# Altium PCB 10515.0502_CVSP1_2020 1P.PcbDoc (part 2 of 2)
Units mm, origin at the board's own origin, x right, y up, seen from the top; angles counter-clockwise.
Board outline 150.42 x 82.13 mm, 2 copper layers (Top Layer, Bottom Layer); 61 components, 37 nets, 190 pads, 35 vias.
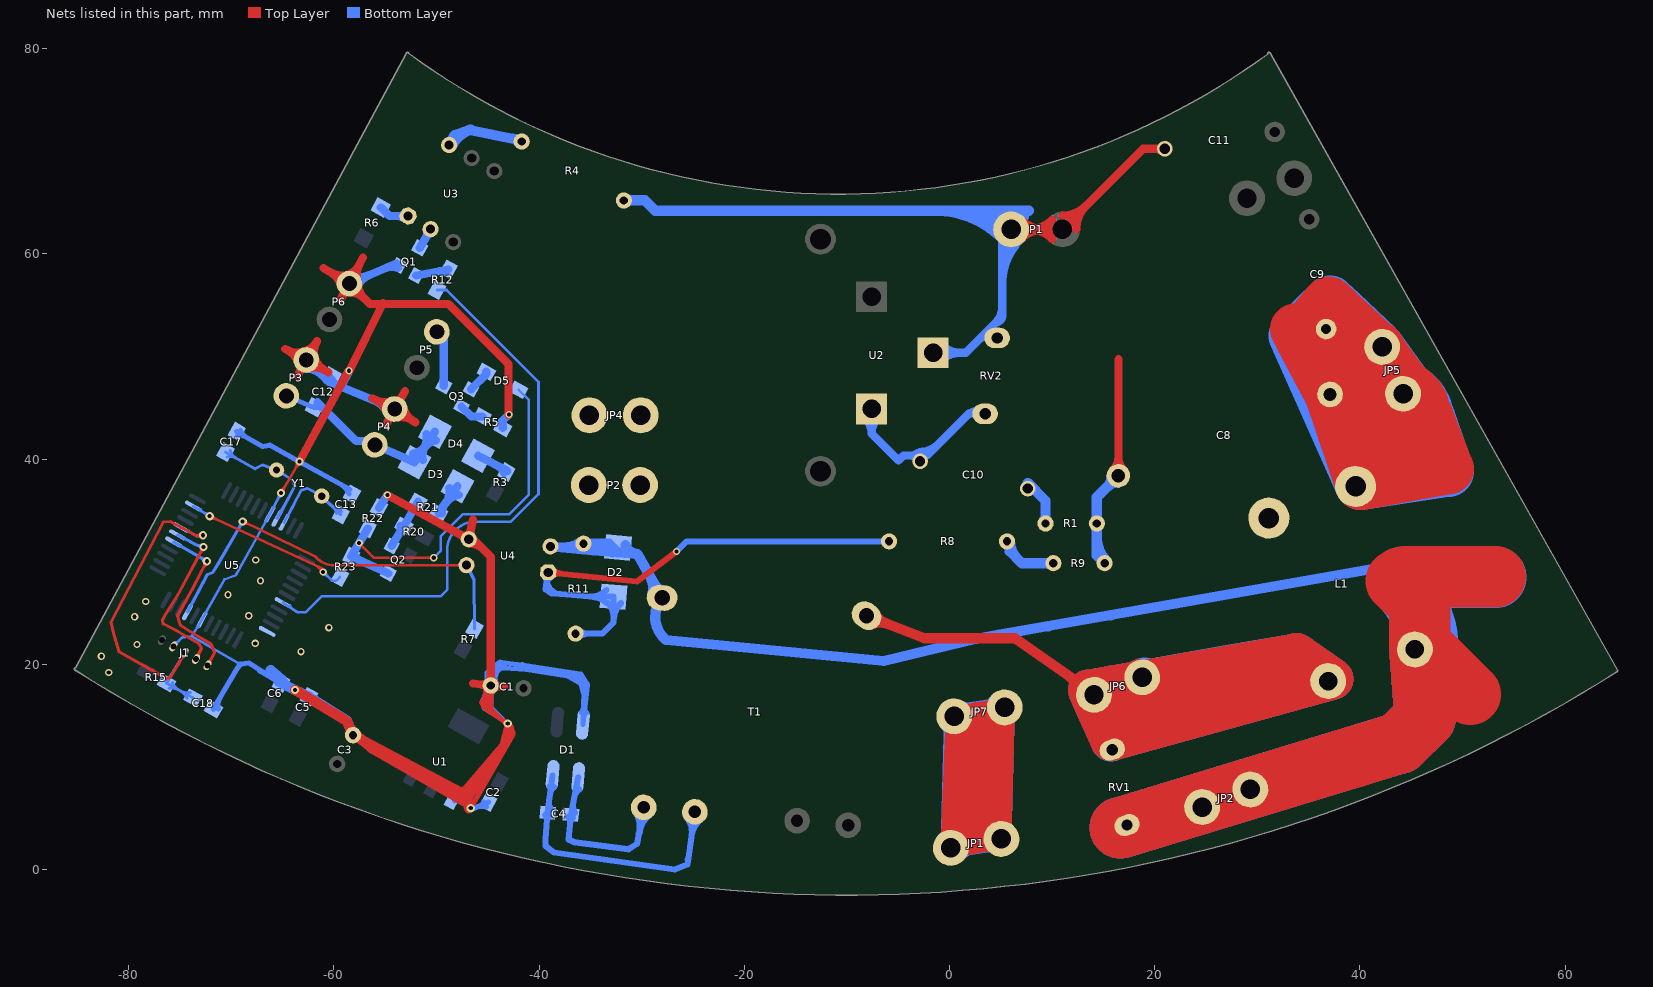
[diagram p2: the nets of this part, all layers, seen from the top]

## Via types
v1: diameter 0.7, hole 0.4, Top Layer to Bottom Layer, tented both sides, 23 vias
v2: diameter 0.8, hole 0.4, Top Layer to Bottom Layer, tented both sides, 12 vias

## Nets (pads, with @x,y where several pads share a name; then routed paths per layer and width w, separated by ;. In a path a pad name is that pad's centre, name@x,y a point inside that pad or via, vN(x,y) a via of type N, cw(c..) or ccw(c..) an arc to the next point about the centre after c; other vN are vias at no path point) (continued)
GND: C1.2 C2.1 C3.2 C5.1 C6.1 C12.1 C13.1 C17.1 C18.1 D1.4 J1.2 P3.1 P4.1 P6.1 Q1.2 R5.1 R22.1 U1.1 U4.3 U5.6 U5.29 | length 453.6
  Top Layer w0.254: v2@-65.22,36.967 ccw(c-65.386,37.605) -64.818,37.272 ccw(c-64.249,36.938) v2@-64.887,36.772 ; v2(-65.151,36.703) v2(-63.364,39.751) -61.785,42.545 -61.658,42.799 v1@-58.547,48.641 ; v2@-63.628,39.682 cw(c-64.266,39.516) -63.697,39.183 cw(c-63.129,38.849) v2@-63.295,39.487 ; v2@-63.437,40.014 ccw(c-63.614,40.649) -63.04,40.325 ccw(c-62.466,40.001) v2@-63.101,39.824 ; P3.1@-62.704,49.657 -62.094,49.274 P3.1@-62.648,49.617 ; -58.856,48.061 cw(c-58.264,47.745) v1@-58.46,48.387 ; -58.768,48.225 ccw(c-59.127,48.416) v1@-58.738,48.535 ; C3.2@-57.45,13.265 -57.375,12.978 -57.284,12.631 -57.272,12.582 -57.186,12.254
  Top Layer w0.508: C3.2@-57.999,12.558 cw(c-57.661,11.284) -56.999,12.424 cw(c-56.337,13.563) C3.2@-57.611,13.226 ; -57.225,12.957 -57.375,12.978 C3.2@-58.139,13.086 ; -47.635,7.49 -43.642,12.126 ; -47.354,6.71 cw(c-48.017,5.673) v2@-46.815,5.938 ; -47.329,6.694 cw(c-47.953,5.716) v2@-46.816,5.941 ; -47.017,6.434 ccw(c-46.525,6.128) v2@-46.919,5.704 ; -46.691,6.957 ccw(c-46.098,6.588) v2@-46.573,6.076 ; C1.2@-45.238,17.769 cw(c-46.496,17.374) -45.328,16.764 cw(c-44.159,16.153) C1.2@-44.554,17.411 ; C1.2@-45.052,17.501 cw(c-45.587,16.815) -44.717,16.815 ; -44.701,15.312 -44.717,15.328 -44.717,15.634 ; C1.2@-44.381,17.501 ccw(c-43.847,16.815) -44.717,16.815 ; -44.098,10.485 -43.707,11.89 ; -43.42,14.437 ccw(c-43.168,14.806) v2@-43.086,14.367 ; -43.157,12.134 -43.053,13.462 v2@-43.059,14.191 ; v2@-43.134,14.099 cw(c-43.758,13.059) -42.581,13.353 ; C3.2@-58.139,13.086 -57.186,12.254 -56.388,11.557 v2(-46.672,5.969) ; C3.2@-58.139,13.086 -57.272,12.582 -49.276,7.938 -47.471,6.784 -46.99,6.477 ; -46.99,6.477 v2(-46.672,5.969) ; -46.99,6.477 -46.551,7.182 -46.239,7.684 -46.001,8.066 -45.212,9.335 -43.707,11.89 ; v2(-46.672,5.969) -42.545,13.208 -42.735,13.97 v2@-43.059,14.191 ; -44.717,15.634 -45.212,16.129 -45.212,16.319 -44.717,16.815 ; -44.717,15.634 -43.813,14.73 -43.813,14.706 ; -44.717,15.634 -44.717,16.815 ; -44.717,16.815 C1.2@-44.717,17.932 -45.593,16.256 -45.339,15.748 -45.074,15.567 -43.813,14.706 ; -43.813,14.706 -43.074,14.201 v2@-43.067,14.196 ; -43.707,11.89 -43.642,12.126 ; -43.642,12.126 v2@-43.067,14.196 ; v2@-43.067,14.196 v2(-43.059,14.224) v2@-43.059,14.191 ; v2@-43.067,14.196 v2@-43.059,14.191
  Top Layer w0.8: -64.75,50.725 P3.1@-62.704,49.657 ; -63.552,48.126 P3.1@-62.704,49.657 ; P3.1@-63.515,49.402 ccw(c-65.473,48.787) -64.523,50.606 ccw(c-63.574,52.426) P3.1@-62.959,50.468 ; v2(-63.364,39.751) v1@-58.547,48.641 ; P3.1@-62.928,50.477 ccw(c-63.468,52.457) -61.686,51.439 ccw(c-59.904,50.42) P3.1@-61.884,49.881 ; P3.1@-62.468,48.84 cw(c-61.9,46.868) -60.908,48.665 cw(c-59.916,50.461) P3.1@-61.887,49.892 ; -61.65,51.501 P3.1@-62.704,49.657 ; -61.025,58.613 P6.1@-58.5,57.1 ; -60.525,48.453 P3.1@-62.704,49.657 ; -59.348,55.569 P6.1@-58.5,57.1 ; P6.1@-59.325,56.893 ccw(c-61.315,56.395) -60.26,58.155 ccw(c-59.205,59.915) P6.1@-58.707,57.925 ; P6.1@-58.754,57.911 ccw(c-59.366,59.87) -57.548,58.918 ccw(c-55.73,57.966) P6.1@-57.689,57.354 ; v1(-58.525,48.6) -55.221,55.208 ; P6.1@-58.5,56.25 cw(c-58.5,54.198) -57.049,55.649 cw(c-55.598,57.1) P6.1@-57.65,57.1 ; -57.175,59.629 P6.1@-58.5,57.1 ; -56.275,45.913 P4.1@-54.075,44.875 ; -54.923,43.344 P4.1@-54.075,44.875 ; P4.1@-54.875,44.588 ccw(c-56.807,43.895) -55.931,45.751 ccw(c-55.055,47.607) P4.1@-54.362,45.675 ; v1(-54.8,36.5) -47.838,32.713 U4.3@-46.864,32.184 ; P4.1@-53.894,44.045 cw(c-53.457,42.039) -52.348,43.766 cw(c-51.239,45.493) P4.1@-53.245,45.056 ; -53.066,46.607 P4.1@-54.075,44.875 ; -52.05,43.575 P4.1@-54.075,44.875 ; U4.3@-47.076,32.508 ccw(c-47.588,33.291) -46.672,33.099 ccw(c-45.757,32.907) U4.3@-46.54,32.395 ; U4.3@-46.864,31.796 cw(c-46.864,29.831) -45.475,31.221 ; -46.462,18.125 C1.2@-44.717,17.932 ; -46.462,34.1 U4.3@-46.864,32.184 ; C1.2@-45.029,17.682 ccw(c-45.783,17.078) -45.677,18.038 ccw(c-45.57,18.998) C1.2@-44.967,18.244 ; C1.2@-45,18.215 ccw(c-45.683,18.898) -44.717,18.898 ccw(c-43.751,18.898) C1.2@-44.434,18.215 ; C1.2@-44.46,17.625 cw(c-43.839,16.886) -43.755,17.848 cw(c-43.671,18.81) C1.2@-44.41,18.189 ; -43.422,17.819 C1.2@-44.717,17.932 ; v1@-43,44.3 -43,49.258 -48.852,55.11 -56.51,55.11 P6.1@-58.5,57.1 ; -47.686,32.63 cw(c-48.133,31.809) U4.3@-47.236,32.074 ; -47.686,32.63 ccw(c-47.239,33.452) U4.3@-46.974,32.555 ; -47.686,32.63 cw(c-48.133,31.809) U4.3@-47.236,32.074 ; -47.686,32.63 ccw(c-47.239,33.452) U4.3@-46.974,32.555 ; -47.686,32.63 cw(c-48.133,31.809) U4.3@-47.236,32.074 ; -47.686,32.63 ccw(c-47.239,33.452) U4.3@-46.974,32.555 ; U4.3@-46.864,32.184 -46.438,32.184 -44.717,30.463 C1.2@-44.717,17.932
  Top Layer w1: v2(-63.786,17.494) -58.737,14.478 C3.2@-58.139,13.086 -57.284,12.631 -47.635,7.49 ; -57.272,12.582 -55.568,11.593 ; -46.926,7.112 -47.635,7.49 ; -46.253,7.977 -44.841,9.964 ; -46.001,8.066 -47.635,7.49
  Bottom Layer w0.254: J1.2@-75.661,21.736 -74.803,22.606 -73.85,22.733 ; J1.2@-75.565,22.084 ccw(c-75.569,22.686) -75.141,22.263 ; -73.373,23.507 cw(c-73.127,23.355) U5.6@-73.193,23.636 ; -69.151,20.002 -73.85,22.733 ; U5.29@-65.847,35.236 cw(c-65.629,35.303) -65.831,35.41 ; v2@-65.412,36.622 cw(c-66.041,36.427) -65.458,36.12 cw(c-64.875,35.813) v2@-65.07,36.442 ; v2(-65.151,36.703) U5.29@-66.256,34.602 -67.501,32.371 -69.57,28.659 -70.675,28.258 U5.6@-72.871,24.319 -73.85,22.733
  Bottom Layer w0.5: P3.1@-62.315,49.432 P3.1@-61.966,49.239
  Bottom Layer w0.508: C18.1@-71.755,15.621 -69.532,19.431 -69.151,20.002 -68.326,20.13 C6.1@-65.151,18.161 -67.246,19.367 ; C18.1@-71.275,15.656 cw(c-69.967,16.001) -71.136,16.683 ; C17.1@-69.469,42.672 -66.929,41.212 -66.23,41.338 v2(-63.364,39.751) C13.1@-58.472,37.041 ; C17.1@-69.37,42.304 cw(c-69.13,41.416) -68.672,42.214 cw(c-68.213,43.011) C17.1@-69.101,42.771 ; -66.198,18.81 ccw(c-65.485,19.96) C6.1@-65.176,18.643 ; C6.1@-65.519,18.062 ccw(c-66.407,17.823) -65.948,18.62 ccw(c-65.489,19.417) C6.1@-65.25,18.529 ; P3.1@-62.704,49.657 C12.1@-60.262,48.006 ; P3.1@-62.515,48.679 cw(c-62.059,46.318) -60.712,48.31 cw(c-59.365,50.302) P3.1@-61.726,49.846 ; C5.1@-62.42,16.828 -58.756,14.523 -58.483,14.351 -58.143,13.085 C3.2@-58.075,12.832 ; C5.1@-62.397,16.345 cw(c-62.097,15.026) -61.377,16.171 ; P3.1@-61.784,49.035 cw(c-63.074,47.127) C12.1@-60.813,47.564 ; C12.1@-60.768,48.348 cw(c-61.371,47.456) C12.1@-60.314,47.66 ; -59.237,37.465 cw(c-59.952,36.175) C13.1@-58.534,36.582 ; C3.2@-58.612,13.358 ccw(c-59.74,14.009) -58.482,14.347 ; -58.483,14.35 ccw(c-57.24,14.684) C3.2@-57.871,13.562 ; U1.1@-48.323,6.985 -46.651,6.005 -46.482,5.905 C2.1@-44.958,6.54 ; U1.1@-48.249,6.699 cw(c-48.068,6.007) -47.707,6.624 cw(c-47.346,7.24) U1.1@-48.037,7.06 ; -47.042,6.234 cw(c-47.292,5.807) v2@-46.814,5.932 ; v2@-46.617,6.104 ccw(c-46.311,6.846) -46.003,6.105 ; -46.075,6.075 cw(c-45.617,4.978) C2.1@-45.165,6.077 ; C2.1@-45.723,6.222 ccw(c-45.973,6.822) C2.1@-45.372,6.574 ; C1.2@-45.238,17.769 cw(c-46.497,17.377) -45.329,16.765 cw(c-44.162,16.152) C1.2@-44.554,17.411 ; C1.2@-45.103,18.318 ccw(c-46.035,19.25) -44.717,19.25 ccw(c-43.399,19.25) C1.2@-44.331,18.318 ; C1.2@-45.07,17.516 cw(c-45.72,16.751) -44.717,16.751 ; C1.2@-45.058,18.359 ccw(c-45.88,19.389) -44.57,19.242 ccw(c-43.26,19.095) C1.2@-44.29,18.273 ; C1.2@-44.912,18.442 ccw(c-45.383,19.673) -44.179,19.136 ccw(c-42.976,18.598) C1.2@-44.207,18.127 ; C1.2@-44.553,18.453 cw(c-44.326,19.177) -45.085,19.177 ; C1.2@-44.363,17.516 ccw(c-43.713,16.751) -44.717,16.751 ; -44.005,19.748 -44.133,19.621 -44.133,19.241 ; -43.611,14.68 -44.717,15.786 ; v2(-43.059,14.224) -45.339,15.684 -45.529,16.383 -45.159,17.09 ; -37.255,18.857 -35.922,18.086 ; D1.4@-35.9,15.283 ccw(c-36.356,15.769) -35.69,15.748 ; D1.4@-35.892,15.29 ccw(c-36.398,15.867) -35.632,15.817 ; D1.4@-35.878,15.302 ccw(c-36.452,16.029) -35.532,15.921 ; -35.682,15.986 ccw(c-34.678,15.953) D1.4@-35.411,15.267 ; -35.626,15.913 ccw(c-34.724,15.855) D1.4@-35.403,15.259 ; -35.547,15.793 ccw(c-34.808,15.706) D1.4@-35.392,15.245 ; -45.159,17.09 -45.056,17.09 -44.717,16.751 ; -45.159,17.09 C1.2@-44.717,17.932 ; -45.085,19.177 -45.085,18.3 C1.2@-44.717,17.932 ; -45.085,19.177 -44.717,19.545 ; -44.717,15.786 -44.717,16.751 ; -44.717,15.786 -45.085,16.154 -45.085,16.383 -44.717,16.751 ; -44.717,16.751 C1.2@-44.717,17.932 ; C1.2@-44.717,17.932 -44.514,19.748 ; C1.2@-44.717,17.932 -44.133,19.241 ; C1.2@-44.717,17.932 -44.717,19.545 ; -44.717,19.545 -44.514,19.748 ; -44.514,19.748 -43.815,20.193 -43.289,20.131 ; -44.133,19.241 -43.289,20.131 ; -43.289,20.131 -41.656,19.939 -35.944,19.028 -35.472,18.28 ; -43.289,20.131 -43.497,19.621 -41.275,19.494 -36.068,18.669 -35.922,18.086 ; -35.922,18.086 -35.687,17.145 -35.636,17.417 ; D1.4@-35.742,14.134 -35.288,17.99 -35.472,18.28 ; D1.4@-35.742,14.134 -35.472,18.28 ; D1.4@-35.742,14.134 -35.636,17.417 ; -35.636,17.417 -35.472,18.28
  Bottom Layer w0.6: P3.1@-61.975,49.236 P3.1@-61.966,49.239
  Bottom Layer w0.8: P3.1@-62.704,49.657 -60.5,47.525 P4.1@-54.075,44.875 ; P3.1@-62.69,48.807 cw(c-62.656,46.755) -61.229,48.23 cw(c-59.802,49.705) P3.1@-61.854,49.671 ; -61.144,48.148 ccw(c-60.459,48.857) C12.1@-60.442,47.871 ; C12.1@-60.221,47.726 ccw(c-59.3,48.11) -59.68,47.187 ; -59.316,47.037 v1(-58.525,48.6) ; P6.1@-58.5,57.1 Q1.2@-53.9,59.065 ; P6.1@-58.183,57.889 ccw(c-57.419,59.793) -56.613,57.906 ccw(c-55.807,56.019) P6.1@-57.711,56.783 ; R22.1@-55.6,35.225 v1(-54.8,36.5) ; -54.945,58.618 cw(c-54.345,57.212) Q1.2@-53.775,58.631 ; P4.1@-54.86,44.549 ccw(c-56.755,43.76) -55.972,45.657 ccw(c-55.19,47.555) P4.1@-54.401,45.66 ; R5.1@-43.55,43.025 -43.55,43.75 v1(-42.95,44.35)
  Bottom Layer w1: -66.173,19.421 C6.1@-65.143,18.535 ; -65.53,18.868 cw(c-66.108,18.196) C6.1@-65.224,18.262 ; C6.1@-65.151,18.161 v2(-63.786,17.494) C5.1@-62.42,16.828 -58.756,14.523 C3.2@-58.143,13.085 ; C6.1@-64.962,18.316 ccw(c-64.244,18.563) -64.577,17.881 ; -62.994,17.108 cw(c-63.327,16.426) C5.1@-62.61,16.673 ; C5.1@-62.452,16.585 cw(c-62.284,15.845) -61.88,16.487
  other v1: -81.95,19.2 -82.675,20.775 -63.226,21.225 -79.2,21.925 -67.675,22.037 -60.5,23.561 -79.425,24.625 -68.306,24.725 -78.35,26.125 -70.338,26.775 -67.15,28.133 -67.625,30.165
ICDCLK: J1.5 U5.16 | length 19.5
  Top Layer w0.3: -74.93,25.273 -75.248,24.701 ; v2@-72.629,29.961 cw(c-73.204,29.78) -72.67,29.501 cw(c-72.135,29.221) v2@-72.315,29.797 ; v2(-72.39,30.035) -73.85,27.241 -75.248,24.701 ; J1.5@-72.328,19.889 -71.628,21.145 -71.992,21.971 -73.914,23.13 -74.956,23.786 -75.093,24.217 ; J1.5@-72.272,20.208 ccw(c-72.372,20.558) -72.054,20.381 ; J1.5@-72.087,20.105 cw(c-71.74,20.204) -72.055,20.379 ; -75.248,24.701 -75.095,24.223 ; -75.095,24.223 -75.093,24.217 ; -75.095,24.223 -75.096,24.218 -75.093,24.217
  Bottom Layer w0.3: U5.16@-75.637,31.912 v2@-72.581,30.162 ; -72.939,30.368 cw(c-73.265,29.798) v2@-72.631,29.97 ; -72.873,30.33 ccw(c-72.6,30.808) v2@-72.456,30.277
ICDDAT: J1.4 U5.17 | length 19.5
  Top Layer w0.3: J1.4@-73.439,20.505 -72.898,21.526 -73.172,22.014 -75.184,23.177 -76.644,23.939 -76.708,24.32 -76.391,24.892 -75.12,26.924 v2(-72.707,31.432) ; J1.4@-73.386,20.823 ccw(c-73.489,21.157) -73.18,20.993 ; J1.4@-73.199,20.724 cw(c-72.84,20.834) -73.172,21.01 ; v2@-72.947,31.36 cw(c-73.524,31.185) -72.992,30.9 cw(c-72.46,30.616) v2@-72.635,31.193
  Bottom Layer w0.3: U5.17@-75.249,32.612 -73.406,31.623 v2(-72.707,31.432) ; v2@-72.925,31.308 ccw(c-73.449,31.009) -73.29,31.591 ccw(c-73.131,32.174) v2@-72.832,31.65
IO_CONTROL_TRIAC: R12.1 U5.40 | length 57.4
  Bottom Layer w0.254: -63.563,25.082 -62.743,25.082 -61.2,26.625 -49.6,26.625 -48.975,27.25 -48.975,31.173 cw(c-46.435,31.173) -48.231,32.969 -48.025,33.175 cw(c-46.305,31.455) -46.305,33.887 -42.763,33.887 -40.068,36.582 -40.068,47.518 -49.025,56.475 R12.1@-49.95,56.475
  Bottom Layer w0.3: U5.40@-64.966,25.997 -63.563,25.082 ; U5.40@-64.305,25.668 ccw(c-64.019,25.729) -64.179,25.484
IO_START_SWITCH: R23.1 U5.21 | length 21.2
  Top Layer w0.254: v2(-72.113,34.43) -61.185,29.345 ; v2@-72.019,34.173 cw(c-71.793,33.554) -71.515,34.152 cw(c-71.237,34.749) v2@-71.856,34.523 ; -61.728,29.598 cw(c-62.064,28.876) v1@-61.272,28.953 ; -61.326,29.411 cw(c-61.551,28.926) v1@-61.019,28.978 ; v1@-61.223,29.115 ccw(c-61.408,29.264) -61.185,29.345 ; v1(-61.05,28.975) -61.185,29.345 ; v1@-61.008,29.194 cw(c-60.962,29.427) -61.185,29.345
  Bottom Layer w0.254: U5.21@-73.697,35.411 v2(-72.113,34.43) ; U5.21@-73.014,35.088 ccw(c-72.731,35.155) -72.884,34.907 ; v2@-72.378,34.367 ccw(c-73.02,34.216) -72.673,34.777 ccw(c-72.326,35.337) v2@-72.175,34.696 ; v1@-61.05,28.752 cw(c-61.05,28.166) -60.635,28.58 ; v1@-60.904,28.849 -60.205,28.15 -59.775,28.15 R23.1@-59.425,28.5 ; v1@-60.827,28.975 ccw(c-60.337,28.975) -60.683,28.628
IO_WORK_INDICATE_LED: U5.44
IO_ZERO_DETECT: R7.1 U4.4 U5.8 | length 41.7
  Top Layer w0.254: v2(-68.9,33.925) -61.872,30.526 -61.743,30.397 ccw(c-59.947,32.193) -59.947,29.653 -51.127,29.653 U4.4@-47.086,29.653 ; v2@-68.81,33.667 cw(c-68.594,33.045) -68.307,33.638 cw(c-68.02,34.231) v2@-68.642,34.015
  Bottom Layer w0.3: U5.8@-74.27,25.095 -72.326,28.765 -71.819,28.956 -71.31,29.781 v2@-68.889,33.915 ; -69.21,33.367 ccw(c-69.774,33.697) v2@-69.142,33.862 ; -69.175,33.427 cw(c-68.697,33.147) v2@-68.837,33.683 ; U4.4@-47.086,29.653 -46.355,28.258 R7.1@-46.291,23.431
L-220V: JP6.1 JP6.2 L1.1 RV1.2 T1.1 | length 285.7
  Top Layer w1: T1.1@-8.094,24.731 -2.428,22.543 6.373,22.543 12.387,18.332 ; T1.1@-7.599,23.885 cw(c-6.754,21.976) -6.002,23.923 ; T1.1@-7.217,24.874 ccw(c-5.814,25.495) -6.367,24.064 ; 11.45,18.989 cw(c9.503,16.208) JP6.2@12.846,16.798 ; 11.886,18.683 ccw(c13.401,20.847) JP6.2@13.859,18.246
  Top Layer w2: JP6.2@13.853,16.299 cw(c12.077,10.597) 17.365,13.373 ; JP6.2@14.632,18.135 cw(c12.746,14.331) 16.769,15.687 ; JP6.2@15.071,17.743 17.88,12.391 ; JP6.2@15.649,16.641 cw(c9.982,13.667) RV1.2@16.093,11.762 ; 16.02,17.911 17.88,12.391 ; 18.256,16.275 cw(c21.013,16.008) JP6.1@19.252,18.146 ; JP6.1@18.455,18.34 17.88,12.391 ; 35.078,17.824 cw(c35.661,15.979) L1.1@36.554,17.696 ; L1.1@37.383,18.552 17.88,12.391 ; RV1.2@16.093,11.762 ccw(c12.364,16.291) 18.202,15.725 cw(c12.364,16.291) RV1.2@16.093,11.762
  Top Layer w4: 16.02,17.911 18.455,18.34 23.304,19.195 ; 18.16,15.29 L1.1@37.383,18.552 ; JP6.1@18.63,18.521 ccw(c24.771,27.172) 26.546,16.713 ; 23.304,19.195 13.531,17.472 15.711,12.562 L1.1@37.383,18.552 ; 23.304,19.195 33.817,21.049 L1.1@37.383,18.552
  Bottom Layer w4: JP6.2@13.927,16.814 ccw(c17.368,21.44) 18.206,15.736 ; 15.102,15.28 L1.1@37.383,18.552 ; 15.519,15.341 ccw(c14.911,19.485) JP6.1@19.02,18.677 ; 16.02,17.911 27.193,19.881 ; JP6.1@18.626,18.524 ccw(c24.124,25.915) 25.462,16.801 ; 27.193,19.881 13.531,17.472 15.737,12.537 L1.1@37.383,18.552 ; 27.193,19.881 33.817,21.049 L1.1@37.383,18.552
L_DETECT: C8.2 C11.2 L1.4 P1.1 R1.1 R4.2 R9.1 RV2.1 U2.2 | length 155.2
  Top Layer w0.8: P1.1@5.994,62.382 10.994,62.382 18.846,70.234 C11.2@20.979,70.234 ; P1.1@6.949,61.428 cw(c9.254,59.123) 9.254,62.382 cw(c9.254,65.642) P1.1@6.949,63.337 ; 10.04,61.428 ccw(c7.735,59.123) 7.735,62.382 ccw(c7.735,65.642) 10.04,63.337 ; 10.994,63.732 ccw(c10.994,66.992) 13.299,64.687 ccw(c15.604,62.382) 12.344,62.382 ; C8.2@15.926,38.897 ccw(c14.658,40.165) 16.452,40.165 ccw(c18.246,40.165) C8.2@16.977,38.897 ; C8.2@16.452,38.372 16.452,49.723 ; C11.2@20.723,69.978 ccw(c20.105,69.36) 20.105,70.234 ccw(c20.105,71.108) C11.2@20.723,70.49
  Bottom Layer w0.8: U2.2@-1.606,50.368 1.582,50.368 5.13,53.916 5.13,61.518 P1.1@5.994,62.382 ; U2.2@-0.828,49.591 cw(c1.05,47.713) 1.05,50.368 cw(c1.05,53.024) U2.2@-0.828,51.146 ; 2.729,51.515 cw(c4.384,49.861) RV2.1@4.384,52.2 ; 4.459,53.225 ccw(c2.84,54.844) 5.13,54.844 ; 4.722,53.378 ccw(c4.572,53.916) 5.13,53.916 ; 5.13,57.037 cw(c11.34,57.037) P1.1@6.949,61.428 ; 5.13,58.968 cw(c9.409,58.968) P1.1@6.383,61.993
  Bottom Layer w1: R4.2@-31.708,65.232 -29.707,65.232 -28.675,64.2 -20.135,64.2 7.736,64.2 ; -1.413,64.2 cw(c-1.413,54.975) P1.1@5.111,61.499 ; 1.002,64.2 cw(c1.002,57.39) P1.1@5.818,62.206 ; 3.416,64.2 cw(c3.416,59.804) P1.1@6.525,62.913 ; 5.83,64.2 cw(c5.83,62.218) 7.232,63.62 ; 14.351,32.378 ccw(c17.646,32.378) R9.1@15.316,30.048 ; R9.1@15.113,29.845 14.351,30.607 R1.1@14.351,33.718 14.351,36.271 C8.2@16.452,38.372 ; C8.2@15.809,38.372 cw(c14.257,38.372) 15.354,37.274 cw(c16.452,36.176) C8.2@16.452,37.729
LED_OUT: D5.2 Q2.3 R22.2 R23.2 | length 40
  Top Layer w0.254: v1(-57.544,31.809) -56.11,30.375 v1(-50.275,30.375)
  Bottom Layer w0.254: D5.2@-42.001,46.752 -41,45.752 -41,36.525 -42.9,34.625 -46.3,34.625 -47.425,34.625 -49.6,32.45 -49.6,31.05 ; -49.6,31.05 v1(-50.275,30.375) -49.6,31.05
  Bottom Layer w0.8: R23.2@-58.035,30.693 ccw(c-57.098,31.042) -57.514,30.133 ; R22.2@-56.708,33.226 R23.2@-58.317,30.499 Q2.3@-54.712,28.854
MCLR: C18.2 J1.3 R15.1 U5.18 | length 44.1
  Top Layer w0.3: -74.834,20.627 cw(c-74.511,20.441) J1.3@-74.608,20.801 ; -74.826,20.64 ccw(c-75.131,20.815) J1.3@-74.792,20.907 ; -74.826,20.628 cw(c-74.507,20.45) J1.3@-74.606,20.801 ; -74.824,20.632 ccw(c-75.137,20.808) J1.3@-74.791,20.905 ; v2@-72.964,32.734 cw(c-73.432,33.116) -73.372,32.515 cw(c-73.312,31.915) v2@-72.929,32.382 ; v2(-72.771,32.575) -73.406,32.512 -75.946,33.909 -76.644,33.846 -81.717,24.13 -81.471,23.05 -80.962,21.213 -76.327,18.605 -76.01,18.669 -75.374,19.685 -75.263,19.879 ; -75.263,19.879 -75.248,19.875 J1.3@-74.55,21.121 -75.263,19.879
  Bottom Layer w0.3: R15.1@-76.083,17.633 cw(c-75.762,16.508) -75.193,17.53 ; R15.1@-75.749,18.232 ccw(c-74.623,18.553) -75.192,17.53 ; -74.889,17.361 cw(c-75.459,16.337) C18.2@-74.332,16.658 ; -74.888,17.36 ccw(c-74.319,18.383) C18.2@-73.998,17.257 ; U5.18@-74.861,33.312 -73.406,32.512 v2(-72.771,32.575) ; -74.848,20.624 cw(c-74.517,20.426) J1.3@-74.611,20.8 ; -74.831,20.653 ccw(c-75.121,20.827) J1.3@-74.792,20.909 ; J1.3@-74.55,21.121 R15.1@-76.327,18.161 C18.2@-73.754,16.729 ; v2@-72.964,32.734 cw(c-73.432,33.116) -73.372,32.515 cw(c-73.312,31.915) v2@-72.929,32.382
MOTO_A: C10.1 JP4.1 JP4.2 P2.1 P2.2 RV2.2 U2.1 | length 25.3
  Bottom Layer w0.8: U2.1@-8.324,44.047 cw(c-9.673,42.481) -7.606,42.481 ; U2.1@-7.606,44.88 -7.606,42.481 ; U2.1@-6.888,44.047 ccw(c-5.539,42.481) -7.606,42.481 ; C10.1@-3.133,40.08 ccw(c-3.751,39.462) -3.751,40.335 ccw(c-3.751,41.209) -3.133,40.591 ; -2.877,40.697 ccw(c-2.877,43.165) -1.132,41.42 ; 1.562,44.114 cw(c3.217,42.46) RV2.2@3.217,44.799 ; RV2.2@3.5,44.775 2.842,44.775 2.492,44.425 1.873,44.425 -2.217,40.335 -4.49,40.335 -4.975,39.85 -7.606,42.481
MOTO_B: C8.1 C9.2 JP5.1 JP5.2 L1.3 | length 245
  Top Layer w5: 35.205,52.544 cw(c36.749,52.67) 35.568,53.672 ; 35.523,53.619 cw(c36.704,52.617) 36.578,54.161 ; C9.2@36.7,52.666 C9.2@36.706,52.558 ; 37.417,51.412 cw(c31.334,47.642) 38.301,46.006 ; 42.164,43.752 41.561,44.725 39.617,47.861 38.951,48.936 C9.2@36.706,52.558 ; 42.369,39.873 ccw(c35.928,46.189) JP5.2@44.948,46.375 ; C9.2@36.706,52.558 C8.1@37.084,46.292 ; C9.2@36.706,52.558 36.656,52.639 36.576,52.768 36.718,52.718 JP5.1@41.545,51.017 ; C8.1@37.084,46.292 L1.3@40.059,37.516 ; C8.1@37.084,46.292 34.368,51.434 34.099,51.943 35.545,53.646 36.957,55.308 38.138,54.204 JP5.1@41.545,51.017 ; L1.3@40.059,37.516 JP5.2@44.198,46.359 JP5.1@42.08,50.394 ; L1.3@40.059,37.516 48.595,39.052 46.605,44.192 ; L1.3@40.059,37.516 46.508,44.093 46.605,44.192 ; JP5.1@41.545,51.017 41.801,50.927 41.879,50.778 JP5.1@42.08,50.394 ; JP5.1@41.545,51.017 41.801,50.778 41.856,50.702 JP5.1@42.08,50.394 ; JP5.1@42.08,50.394 44.737,46.752 46.605,44.192 ; 33.718,52.666 ccw(c36.301,54.03) 37.121,51.226 cw(c36.301,54.03) 33.718,52.666 ; 37.37,47.508 cw(c35.734,40.541) 41.817,44.311 ccw(c35.734,40.541) 37.37,47.508 ; JP5.2@44.501,47.045 cw(c43.217,44.138) 46.181,45.286 ccw(c43.217,44.138) JP5.2@44.501,47.045
  Bottom Layer w5: C9.2@36.7,52.666 C8.1@37.084,46.292 L1.3@40.059,37.516 ; 40.957,48.768 42.42,45.551 42.545,45.276 L1.3@40.059,37.516 ; 41.325,47.96 ccw(c45.204,49.723) JP5.2@43.983,45.641 ; 42.486,39.853 ccw(c36.851,45.707) JP5.2@44.945,46.426 ; 44.198,41.501 ccw(c41.292,44.519) JP5.2@44.831,46.761 ; L1.3@40.059,37.516 48.595,38.798 46.795,44.001 ; L1.3@40.059,37.516 46.625,43.838 46.795,44.001 ; L1.3@40.059,37.516 36.299,45.941 33.862,51.399 33.591,52.006 35.532,53.877 37.084,55.372 38.231,54.291 41.801,50.927 41.925,50.755 44.788,46.785 46.795,44.001 ; JP5.2@44.525,47.034 cw(c42.805,43.493) 46.525,44.78 ccw(c42.805,43.493) JP5.2@44.525,47.034
N-220V: D2.1 JP2.1 JP2.2 L1.2 R11.1 RV1.1 T1.2 U4.2 | length 246.5
  Top Layer w1: JP2.2@24.607,6.065 JP2.2@24.617,6.084
  Top Layer w6: RV1.1@16.642,4.049 35.066,9.646 39.551,11.009 43.829,12.308 46.344,14.772 L1.2@45.841,21.63 ; 50.743,17.053 46.166,21.63 L1.2@45.841,21.63 ; 53.191,28.513 44.519,28.513 ccw(c44.519,27.142) 43.55,28.112 45.097,26.565 cw(c43.301,24.769) 45.841,24.769 L1.2@45.841,21.63
  Bottom Layer w1: U4.2@-38.895,31.486 -35.735,31.206 -34.694,31.114 D2.1@-32.363,30.907 ; -37.74,31.384 ccw(c-37.514,33.932) R11.1@-35.871,31.97 ; R11.1@-35.687,31.75 -33.206,31.75 D2.1@-32.363,30.907 ; R11.1@-35.467,31.934 ccw(c-33.505,33.577) -33.731,31.028 ; R11.1@-34.986,31.75 cw(c-34.986,28.78) D2.1@-32.886,30.88 ; D2.1@-31.595,31.606 ccw(c-30.339,32.072) -30.458,30.738 ; -29.22,28.608 cw(c-31.412,27.375) T1.2@-28.99,26.697 ; -28.731,27.74 ccw(c-27.767,28.283) T1.2@-28.065,27.218 ; T1.2@-28.517,26.472 T1.2@-28.517,26.543 ; JP2.2@24.607,6.065 JP2.2@24.617,6.084 ; L1.2@44.333,22.156 ccw(c40.436,24.885) 45.121,25.711 ; L1.2@45.152,21.583 ccw(c43.233,22.927) 45.54,23.333 ; 45.548,23.288 ccw(c46.807,23.51) L1.2@46.074,22.463 ; L1.2@45.841,21.63 44.858,27.201 43.634,28.058 42.302,28.991 41.753,29.376 15.706,24.783 9.623,23.71 4.847,22.868 2.482,22.451 -6.413,20.32 -27.622,22.352 cw(c-25.76,24.611) T1.2@-28.018,26.473 -30.416,30.734 D2.1@-32.363,30.907 ; R11.1@-35.401,31.776 ccw(c-34.678,31.841) -34.742,31.118 cw(c-34.678,31.841) R11.1@-35.401,31.776
  Bottom Layer w6: RV1.1@16.642,4.049 43.829,12.308 46.344,14.772 45.841,21.63 45.841,25.846 43.575,28.112 cw(c44.422,27.264) 44.422,28.463 53.252,28.463 ; 44.033,27.654 cw(c37.818,21.439) L1.2@46.607,21.439
NetC4_1: C4.1 D1.2 T1.4 | length 33.5
  Bottom Layer w0.6: C4.1@-39.433,5.306 cw(c-40.046,4.778) -39.24,4.718 cw(c-38.433,4.658) C4.1@-38.961,5.271 ; -39.029,6.635 ccw(c-37.798,6.469) C4.1@-38.786,5.716 ; D1.2@-39.003,8.093 cw(c-39.463,7.742) -38.89,7.665 ; -38.917,7.461 cw(c-38.055,7.344) D1.2@-38.582,8.036 ; D1.2@-38.685,9.171 C4.1@-39.179,5.524 -39.37,2.984 -39.37,2.286 -38.544,1.651 -26.797,0 -25.527,0.508 -25.445,1.107 ; T1.4@-25.581,5.042 cw(c-27.409,3.656) -25.137,3.344 cw(c-22.865,3.031) T1.4@-24.25,4.859 ; -25.527,0.953 -25.445,1.107 ; T1.4@-24.824,5.616 -25.445,1.107
NetC4_2: C4.2 D1.1 T1.3 | length 29.6
  Bottom Layer w0.6: C4.2@-37.162,5.114 cw(c-37.789,4.603) -36.984,4.521 cw(c-36.18,4.439) C4.2@-36.691,5.066 ; -36.687,6.431 ccw(c-35.47,6.194) C4.2@-36.498,5.501 ; -36.548,7.14 cw(c-35.521,6.94) D1.1@-36.106,7.808 ; D1.1@-36.195,8.953 C4.2@-36.902,5.325 -37.148,2.921 -36.707,2.72 -36.547,2.647 -31.305,1.966 -30.48,2.476 -30.288,3.492 ; T1.3@-30.59,5.516 cw(c-32.484,4.223) -30.231,3.798 cw(c-27.977,3.372) T1.3@-29.27,5.267 ; T1.3@-30.577,5.498 cw(c-32.44,4.161) -30.177,3.788 cw(c-27.914,3.416) T1.3@-29.251,5.28 ; -30.288,3.492 T1.3@-29.805,6.051 -30.226,3.492 -30.288,3.492
NetC10_2: C10.2 R1.2 | length 4.7
  Bottom Layer w1: C10.2@7.623,37.668 9.351,35.941 R1.2@9.351,33.718
NetC12_2: C12.2 D3.2 D4.2 P3.2 P4.2 | length 25.1
  Bottom Layer w0.3: P3.2@-64.656,46.206 P3.2@-63.681,46.467
  Bottom Layer w0.5: P3.2@-64.64,46.166 C12.2@-61.924,45.007
  Bottom Layer w0.8: C12.2@-61.67,45.18 cw(c-61.67,44.195) -60.974,44.891 ; C12.2@-61.608,45.526 -57.834,41.752 P4.2@-56.714,41.752 ; P4.2@-56.014,41.377 D3.2@-52.148,39.677 D4.2@-50.173,42.652 ; D3.2@-52.273,40.522 ccw(c-52.659,42.434) -51.034,41.356 ; D3.2@-51.33,39.897 cw(c-49.456,40.275) -51.049,41.333 ; -51.287,40.974 cw(c-49.662,39.895) D4.2@-50.049,41.807 ; -51.273,40.996 ccw(c-52.866,42.054) D4.2@-50.991,42.432
NetC13_2: C13.2 U5.31 Y1.2 | length 12.9
  Bottom Layer w0.3: -63.881,35.623 U5.31@-64.857,33.826 -63.182,36.957 -62.611,37.148 Y1.2@-61.196,36.386 C13.2@-59.338,34.577 ; -60.413,35.623 ccw(c-59.304,36.762) C13.2@-59.283,35.173 ; -59.989,35.21 cw(c-60.514,34.671) C13.2@-59.761,34.681 ; -59.894,35.118 ccw(c-59.29,35.738) C13.2@-59.279,34.873
NetC17_2: C17.2 U5.30 Y1.1 | length 15.4
  Bottom Layer w0.3: C17.2@-70.577,40.673 -67.691,39.052 -66.929,39.433 Y1.1@-65.596,38.925 -64.799,38.427 -64.072,37.973 -63.817,37.338 U5.30@-65.319,34.55 ; C17.2@-70.446,40.206 cw(c-70.129,39.078) -69.556,40.099 cw(c-68.983,41.121) C17.2@-70.11,40.804 ; U5.30@-65.557,34.214 -64.516,36.068 ; U5.30@-65.232,34.874 ccw(c-65.307,35.126) -65.076,35.001
NetD2_2: D2.2 R8.2 R11.2 U4.1 | length 66.5
  Top Layer w0.6: U4.1@-39.116,28.956 -30.48,28.067 v1(-26.61,30.993) ; U4.1@-38.808,28.578 cw(c-38.066,27.665) -37.945,28.836 cw(c-37.825,30.006) U4.1@-38.738,29.264
  Bottom Layer w0.5: U4.1@-39.116,28.956 ccw(c-37.634,28.363) -38.227,26.88
  Bottom Layer w0.6: U4.1@-39.509,28.668 cw(c-40.458,27.972) -39.295,27.793 cw(c-38.132,27.614) U4.1@-38.828,28.563 ; U4.1@-39.116,28.956 -39.37,27.305 -38.798,26.924 -37.973,26.86 -35.089,26.587 D2.2@-32.74,26.587 -32.74,24.093 -33.849,22.983 R11.2@-36.454,22.983 ; R11.2@-36.109,22.639 cw(c-35.277,21.807) -35.277,22.983 cw(c-35.277,24.16) R11.2@-36.109,23.328 ; -34.997,26.587 ccw(c-34.997,28.781) D2.2@-33.446,27.23 ; -34.968,26.587 cw(c-34.968,24.435) D2.2@-33.446,25.957 ; D2.2@-33.306,25.945 cw(c-34.675,24.577) -32.74,24.577 ; -32.74,24.24 cw(c-30.329,24.24) D2.2@-32.034,25.945 ; v1(-26.61,30.993) -25.653,31.95 R8.2@-5.9,31.95 ; -6.762,31.95 ccw(c-6.762,33.212) R8.2@-5.87,32.32 ; R8.2@-6.641,31.95 cw(c-6.641,30.859) R8.2@-5.87,31.63
NetD3_1: D3.1 R21.1 | length 7
  Bottom Layer w0.8: R21.1@-49.8,34.725 D3.1@-47.95,37.35 ; R21.1@-49.457,34.704 cw(c-48.474,34.874) -49.29,35.449 ; -49.113,35.7 cw(c-47.513,34.572) D3.1@-47.847,36.501 ; -49.092,35.729 ccw(c-50.65,36.827) D3.1@-48.772,37.152
NetD4_1: D4.1 R3.1 | length 4.1
  Bottom Layer w0.8: D4.1@-45.975,40.325 R3.1@-43.08,38.845 ; -43.979,39.305 cw(c-44.489,38.308) R3.1@-43.424,38.653
NetD5_1: D5.1 Q3.1 | length 2.3
  Bottom Layer w0.8: Q3.1@-46.625,46.8 -45.149,48.276 D5.1@-45.149,48.498
NetJP1_1: JP1.1 JP1.2 JP7.1 JP7.2 | length 180.5
  Top Layer w2: JP7.2@0.456,14.923 2.618,15.304 ; JP7.2@0.625,14.8 JP1.2@0.126,2.107 JP1.1@5.05,2.975 JP7.1@5.38,15.791 3.652,15.487 ; JP1.2@1.726,2.389 2.618,15.304 ; JP1.1@3.43,2.689 3.652,15.487 ; 2.618,15.304 3.652,15.487
  Bottom Layer w0.8: JP1.2@-0.829,3.061 ccw(c-3.133,5.366) 0.126,5.366 ccw(c3.385,5.366) JP1.2@1.081,3.061 ; JP7.2@-0.499,13.968 cw(c-2.008,12.46) 0.126,12.46 ; 0.126,10.868 cw(c4.511,10.868) JP7.2@1.41,13.968 ; 0.126,12.799 cw(c2.579,12.799) JP7.2@0.844,14.534 ; JP1.2@1.136,1.211 cw(c3.13,-0.559) 3.13,2.107 ; JP1.2@1.136,3.003 ccw(c3.13,4.773) 3.13,2.107 ; JP7.2@1.465,14.027 cw(c3.459,12.257) 3.459,14.923 ; JP7.2@1.465,15.819 ccw(c3.459,17.589) 3.459,14.923 ; 1.902,2.107 ccw(c1.902,5.76) JP1.1@4.638,3.339 ; 2.232,14.923 ccw(c2.232,18.576) JP7.1@4.968,16.156 ; JP1.1@4.039,3.869 cw(c0.126,7.33) JP1.2@0.126,2.107 ; JP7.1@4.368,16.686 cw(c0.456,20.147) JP7.2@0.456,14.923 ; JP1.1@5.05,2.975 4.926,2.851 cw(c3.13,4.647) 3.13,2.107 ; JP7.1@5.38,15.791 5.255,15.667 cw(c3.459,17.463) 3.459,14.923 ; JP1.2@0.126,2.107 3.13,2.107 ; JP1.2@0.126,2.107 0.126,14.127 cw(c1.251,14.127) JP7.2@0.456,14.923 ; JP7.2@0.456,14.923 2.35,14.923 3.459,14.923
  Bottom Layer w2: JP7.2@0.3,15.075 JP7.1@3.736,15.559 ; JP7.2@0.456,14.923 JP1.2@0.126,2.107 JP1.1@4.926,2.851 ; JP1.2@1.575,2.95 2.35,14.923 ; 3.275,3.45 JP7.1@3.736,15.559 ; JP1.1@5.05,2.975 JP7.1@5.38,15.791 JP7.1@3.736,15.559
NetP5_1: P5.1 Q3.3 | length 5.5
  Bottom Layer w0.8: P5.1@-49.975,52.4 -49.296,51.721 Q3.3@-49.296,47.137
NetQ1_1: Q1.1 R12.2 | length 3.9
  Bottom Layer w0.8: Q1.1@-51.975,57.9 R12.2@-48.842,58.474 ; -49.712,58.315 cw(c-49.549,57.427) R12.2@-49.037,58.17
NetQ1_3: Q1.3 U3.2 | length 3.6
  Bottom Layer w0.8: Q1.3@-51.638,60.571 U3.2@-50.575,62.405 ; U3.2@-50.95,62.305 cw(c-51.853,62.065) -51.044,61.596 cw(c-50.235,61.127) U3.2@-50.476,62.031
NetQ2_1: Q2.1 R20.1 R21.2 | length 5.8
  Bottom Layer w0.8: Q2.1@-54.375,31.525 R20.1@-53.175,33.475 R21.2@-51.799,35.833 ; -53.636,32.726 ccw(c-54.488,33.25) R20.1@-53.515,33.482
NetQ3_2: Q3.2 R5.2 | length 2.4
  Bottom Layer w0.8: Q3.2@-47.57,45.094 -46.609,44.133 R5.2@-45.549,44.133
NetR4_1: R4.1 U3.6 | length 10.6
  Bottom Layer w1: U3.6@-48.795,70.614 -48.26,71.564 -46.799,72.072 R4.1@-42.251,71.163 ; U3.6@-48.516,70.478 cw(c-45.621,69.077) -46.678,72.115 ; -42.599,71.232 cw(c-42.802,70.215) R4.1@-41.939,70.791
NetR6_2: R6.2 U3.1 | length 4.5
  Bottom Layer w0.8: R6.2@-55.437,64.524 -54.588,63.675 U3.1@-52.775,63.675 ; U3.1@-53.049,63.401 ccw(c-53.71,62.74) -53.71,63.675 ccw(c-53.71,64.61) U3.1@-53.049,63.949
NetR8_1: R8.1 R9.2 | length 8.3
  Bottom Layer w1: R8.1@5.448,31.731 cw(c5.004,31.02) 5.842,31.02 ; R8.1@5.842,31.941 5.842,31.051 7.049,29.845 R9.2@10.113,29.845 ; R8.1@5.887,31.975 ccw(c8.227,31.975) 6.573,30.321
pads on no net: P1.2 T1.5 T1.6 U2.4 U2.5 U3.3 U3.5 U5.1 U5.2 U5.3 U5.4 U5.5 U5.9 U5.10 U5.11 U5.12 U5.13 U5.14 U5.15 U5.19 U5.20 U5.22 U5.23 U5.24 U5.25 U5.26 U5.27 U5.32 U5.33 U5.34 U5.35 U5.36 U5.37 U5.38 U5.39 U5.41 U5.42 U5.43

## Polygon pours and split planes (outlines as drawn)
L_DETECT on Bottom Solder "TopLayer-No Net" (solid): 33.757,32.563 23.724,30.836 21.869,37.846 32.995,36.373 33.757,32.563
L_DETECT on Bottom Solder "TopLayer" (hatched 90Degree grid 0 track 0.025, remove dead copper): -2.222,65.278 9.525,67.373 21.526,72.644 22.733,70.612 14.478,62.547 13.018,55.499 15.303,50.419 20.383,48.514 21.717,48.514 32.194,37.91 33.147,36.258 20.574,36.893 13.906,37.084 8.954,46.038 2.857,48.069 -2.286,48.578 -2.476,65.215 -2.222,65.278
L_DETECT on Bottom Solder "TopLayer" (hatched 90Degree grid 0 track 0.025, remove dead copper): 37.02,57.531 31.305,52.324 36.068,41.275 39.306,35.496 49.911,37.02 50.863,38.798 48.514,44.895 43.307,52.387 37.02,57.531
MOTO_A on Bottom Solder "TopLayer" (hatched 90Degree grid 0 track 0.025, remove dead copper): -36.639,47.498 -30.797,50.736 -15.621,51.371 -9.525,47.307 -5.842,47.244 -4.318,45.339 5.524,44.767 5.969,41.529 4.255,39.306 -4.255,39.179 -7.683,43.243 -22.606,43.688 -25.019,37.465 -28.258,35.56 -37.02,35.369 -36.957,47.371 -36.767,47.434
GND on Top Layer "Top Layer-No Net" (hatched 90Degree grid 0.508 track 0.508, remove dead copper, pour order 1000): -61.555,64.346 -85.536,19.786 -62.866,8.07 -60.791,7.32 -58.516,6.47 -49.216,3.495 -43.469,13.757 -43.466,27.67 -42.274,48.411 -42.266,50.095 -48.14,57.145 -61.569,64.32
N-220V on Top Layer "TopLayer-No Net" (solid, pour order 20): 38.165,7.584 46.14,9.895 57.367,15.788 58.586,25.008 55.869,29.885 43.092,23.738 42.711,15.636 38.165,7.584
L_DETECT on Top Layer "TopLayer" (solid, remove dead copper, pour order 23): 21.717,73.152 -2.667,65.786 -2.476,48.45 -1.016,48.006 2.603,48.006 8.826,45.974 13.906,36.767 21.717,36.386 23.241,30.162 34.29,32.131 34.353,32.194 32.956,37.846 21.907,48.895 20.13,48.959 16.51,49.974 13.716,54.229 13.399,56.134 15.176,62.23 23.241,70.294 21.717,73.088
MOTO_A on Top Layer "TopLayer" (solid, remove dead copper, pour order 27): -37.148,46.863 -37.084,34.989 -27.94,35.115 -25.146,36.893 -22.733,42.355 -22.288,43.434 -8.001,43.053 -4.889,38.862 4.445,38.862 5.651,40.322 6.35,41.275 6.35,45.085 -4.064,45.529 -5.524,47.434 -37.148,48.006 -37.148,46.482
MOTO_A on Top Layer "TopLayer" (solid, remove dead copper, pour order 28): -37.02,47.942 -31.051,51.308 -15.176,51.88 -9.144,47.498 -14.922,45.085 -37.211,45.593 -36.83,48.006
GND on Bottom Layer "Top Layer-No Net" (hatched 90Degree grid 0.508 track 0.508, remove dead copper, pour order 1001): -85.139,19.558 -61.067,64.125 -47.688,56.858 -39.939,48.033 -41.464,49.912 -42.164,40.883 -44.439,14.108 -49.389,3.058 -85.139,19.308
L_DETECT on Bottom Layer "TopLayer-No Net" (solid, pour order 25): 25.908,44.856 34.341,36.449 35.784,31.458 23.569,28.989 20.828,39.903 25.908,44.856
N-220V on Bottom Layer "TopLayer-No Net" (solid, pour order 24): 38.165,7.584 46.14,9.895 57.367,15.788 58.586,25.008 55.869,29.885 43.092,23.738 42.711,15.636 38.165,7.584
L_DETECT on Bottom Layer "TopLayer" (solid, remove dead copper, pour order 21): 21.209,74.676 23.241,70.294 15.24,62.293 13.716,58.293 13.399,56.007 13.716,54.229 14.541,52.642 16.7,49.974 20.13,48.959 21.907,48.895 32.956,37.83 34.349,32.214 23.273,30.166 21.717,36.386 13.906,36.767 8.826,45.974 2.603,48.006 -0.953,48.006 -2.476,48.45 -2.667,67.501 21.209,74.676
MOTO_A on Bottom Layer "TopLayer" (solid, remove dead copper, pour order 29): -37.148,47.816 -31.051,51.308 -15.176,51.816 -9.144,47.498 -5.524,47.434 -4.064,45.529 6.35,45.085 6.35,41.212 4.445,38.862 -4.889,38.862 -8.001,43.053 -22.288,43.434 -25.146,36.893 -28.003,35.052 -37.148,35.052 -37.148,48.006 -31.051,51.308
GND on Bottom Layer "TopLayer" (hatched 90Degree grid 0 track 0.025, remove dead copper, pour order 31): -61.914,62.611 -66.459,54.165 -66.425,54.229

## Keep-outs
Top Layer:
  circle w0.127: c-55.024,22.73 r3.5
Bottom Layer:
  circle w0.127: c-55.024,22.705 r3.5
Keep-Out Layer:
  circle w0.127: c-40.634,56.339 r2.3
  circle w0.127: c20.977,56.339 r2.3
  circle w0.127: c-40.657,56.263 r4
  circle w0.127: c-55.024,22.755 r2.3
  lines w0.254: -85.176,-6.045 -85.175,-5.537 ; -85.12,19.491 -52.82,79.509 ; -83.652,-6.301 -85.176,-5.791 ; -83.651,-5.285 -85.176,-5.791 ; -52.841,79.479 ccw(c-10.798,136.693) 31.19,79.439 ; -20.023,-5.869 -85.176,-5.791 ; -12.175,-2.391 cw(c-12.175,-2.726) -11.938,-2.489 ; -0.167,-5.893 64.986,-5.971 ; 31.139,79.509 64.986,19.371 ; 63.461,-6.477 64.986,-5.971 ; 63.462,-5.461 64.986,-5.971 ; 64.985,-6.225 64.986,-5.717 ; 64.986,-6.001 64.986,19.371 ; -85.176,-5.791 -85.176,19.551 ; -85.176,19.551 ccw(c-9.954,137.626) 64.986,19.371 ; -85.176,19.551 ccw(c-9.954,137.626) 64.986,19.371
  lines w1: -36.4,64.794 -30.875,62.825 ; 6.858,33.782 8.509,31.686 10.351,31.686 ; 9.953,26.589 34.564,30.928 ; 10.707,1.234 10.707,6.5 12.108,7.901 41.06,16.22 40.127,23.518 37.804,25.145 32.284,24.171 14.258,20.993 ; 31.229,30.34 36.153,31.208 46.986,33.119 ; 31.242,43.18 33.909,39.014 35.864,31.137
  lines w1.2: -41.525,24.825 -41.525,31.6 -38.15,34.975 -38.15,49.88 ; -38.934,34.191 -29.241,34.191 ; -11.709,24.738 -9.423,22.452 -5.613,22.452
  text "150.16145 (mm)" at -19.77,-6.784 h1.52 r359.93

## Other copper
Top Layer:
  rectangle net MOTO_A: -4.568,38.85 -0.675,39.635
  pour cut-out: -46.15,30.425 -46.15,29 -48.1,27.2 -52,27.2 -52,29.653

## Silkscreen, mask and mechanical layers (free items; w line width, h text height)
Top Overlay:
  text "地线" at 24.75,62.325 h1.5
  text "电源指示灯" at -57.15,60.1 h1.5 r61
  text "火线" at -28.175,47.375 h1.5
  text "电机线" at -32.05,47.275 h1.5
  text "输出指示灯" at -46.375,45.4 h1.5 r61
  text "零线" at 46.525,43.725 h1.5 r24
  text "电机线" at 42.9,42.175 h1.5 r24
  text "信号线" at -69.025,41.55 h1.5 r61
  text "信号线" at -50.15,38.025 h1.5 r61
  text "火线" at 8.825,17.35 h1.5
  text "零线" at 32.175,8.05 h1.5
Bottom Overlay:
  text "10515.0502_CVSP1 2020_V1.1" at 3.725,19.85 h3
  text "20201019H1.6Sn" at -5.775,16.5 h3
Bottom Solder:
  lines w0.254: -62.648,49.617 -61.023,48.45
  lines w0.3: -64.643,46.158 -62.337,45.192
  lines w3: 16.02,17.911 33.817,21.049 37.383,18.552 16.981,12.765 13.531,17.472 ; 24.617,6.084 24.717,6.264 ; 30.062,20.335 13.531,17.472 ; 34.101,18.506 18.581,15.509 13.531,17.472
  lines w5: 16.549,4.282 39.917,11.165 44.159,12.74 ; 44.769,13.045 46.14,15.28 45.841,21.63